# EAGLE board datalogger_small (EAGLE 9.6.2)
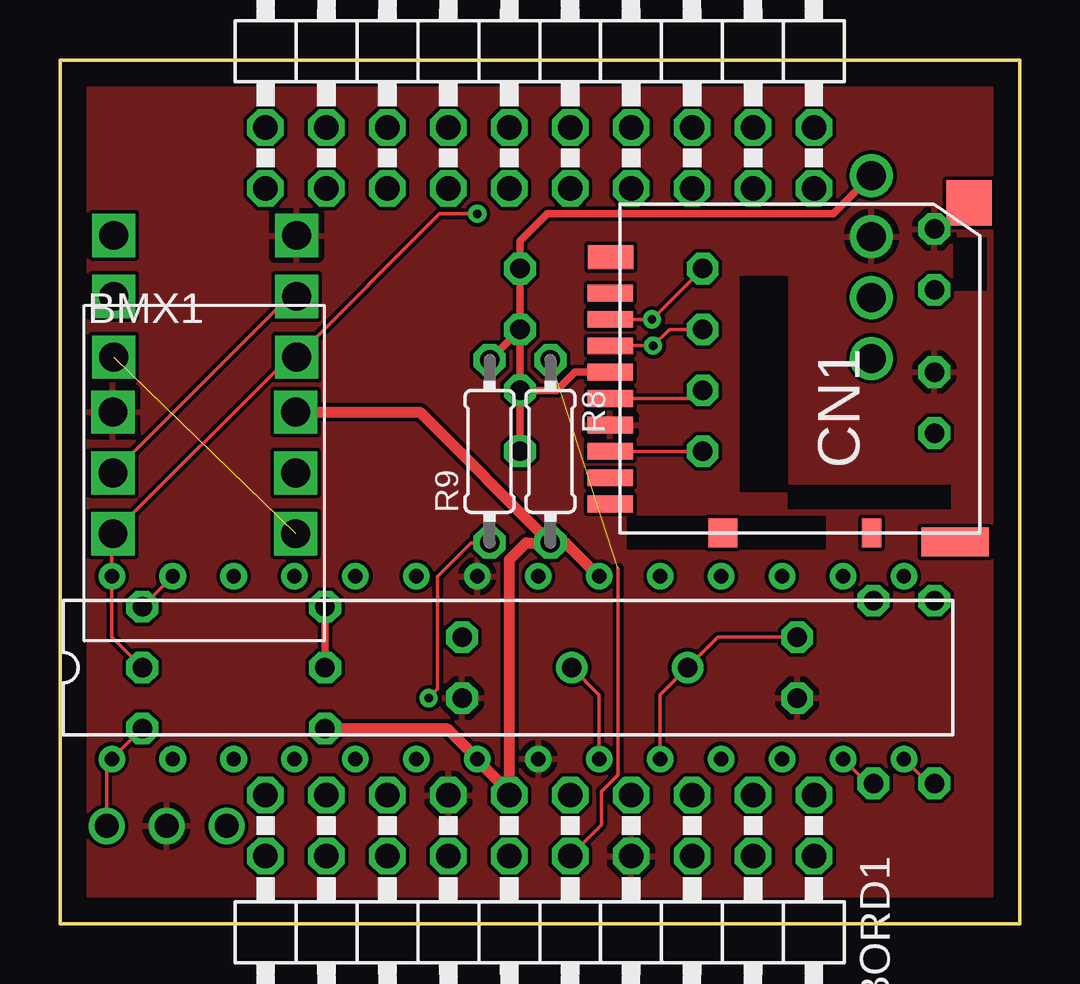
[diagram p0: board, top side]
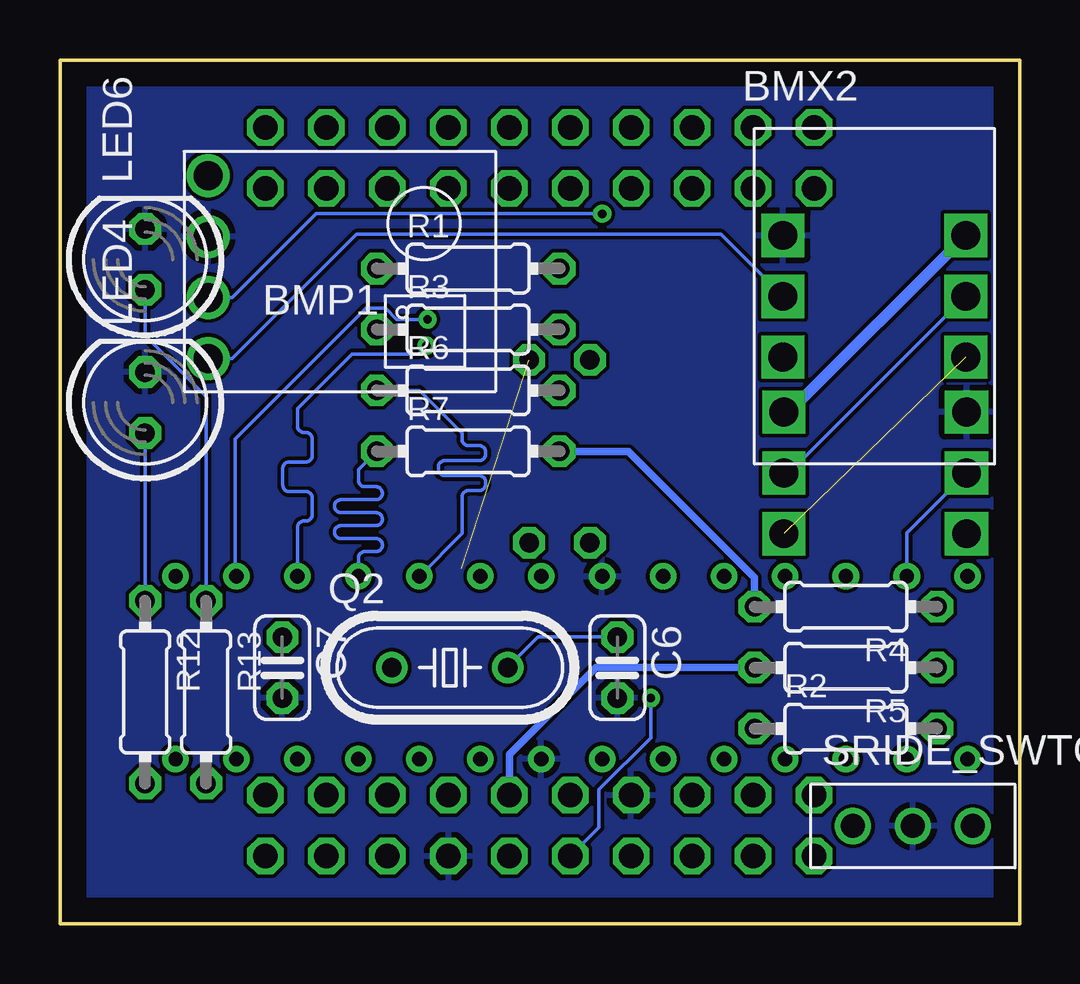
[diagram p1: board, bottom side, seen from below]

Size 40 x 36 mm. Coordinates in mm from the lower left corner, seen from the top.
Outline: 0,0 0,36 40,36 40,0 0,0
Copper layers (1*16): Top 0.035mm / dielectric 1.5mm / Bottom 0.035mm
Design rules "default": minimum track width 6mil, minimum drill 0.35mm, track to track 6mil, track to pad 6mil, pad to pad 6mil, via to via 6mil, smd to smd 6mil, copper to edge 40mil, drill to drill 6mil, minimum pad ring 10mil, minimum via ring 8mil, stop-mask expansion 4mil, vias tented up to drill 0mil, thermal gap 10mil
Net classes: 1 SIGNAL: width 0.152 mm, drill 0.152 mm, clearance 0.152 mm; 2 POWER_H: width 0.457 mm, drill 0.152 mm, clearance 0.152 mm; 3 POWER_L: width 0.305 mm, drill 0.152 mm, clearance 0.152 mm; 4 GND: width 0.305 mm, drill 0.152 mm, clearance 0.152 mm

## Footprints (pad centres in the part's own frame; a part is rotated, then mirrored left to right if it is on the bottom)
GY-68 = drill 1.2: P1 -5,4; P2 -5,1.46; P3 -5,-1.08; P4 -5,-3.62
BMX055 = drill 1.2 pad 1.5 square: 3V3 8.81,-9.53; GND 1.19,-4.46; SCL 1.19,-9.53; SDA 1.19,-7; VCC 8.81,-4.46; VCCIO 8.81,-7
2X10/90 = drill 1.016 octagon: 1 -11.43,-6.35; 2 -11.43,-3.81; 3 -8.89,-6.35; 4 -8.89,-3.81; 5 -6.35,-6.35; 6 -6.35,-3.81; 7 -3.81,-6.35; 8 -3.81,-3.81; 9 -1.27,-6.35; 10 -1.27,-3.81; 11 1.27,-6.35; 12 1.27,-3.81; 13 3.81,-6.35; 14 3.81,-3.81; 15 6.35,-6.35; 16 6.35,-3.81; 17 8.89,-6.35; 18 8.89,-3.81; 19 11.43,-6.35; 20 11.43,-3.81
C025-024X044 = drill 0.813 octagon: 1 -1.27,0; 2 1.27,0
DM3AT = smd 0.7 x 1.9: CD/DAT3 2.2,6.4; CLK -1.1,6.4; CMD 1.1,6.4; DAT0 -3.3,6.4; DAT1 -4.4,6.4; DAT2 3.3,6.4; DET_B -5.5,6.4; VDD 0,6.4; VSS -2.2,6.4 | smd 1.2 x 0.8: DET_A -6.7,-4.5 | smd 1 x 1.9: P$9 4.8,6.381 | smd 1.2 x 1.2: P$11 -6.7,1.7 | smd 1.2 x 2.8: P$13 -7.081,-7.973 | smd 1.9 x 1.9: P$14 7.054,-8.562
LED5MM = drill 0.813 octagon: A -1.27,0; K 1.27,0
HC49/S = drill 0.813: 1 -2.413,0; 2 2.413,0
0204/7 = drill 0.813 octagon: 1 -3.81,0; 2 3.81,0
SRIDE_SWITCH = drill 1: L -2.5,0; LR 0,0; R 2.5,0
ATMEGA328P = drill 0.6: AREF 17.78,7.62; AVCC 20.32,7.62; D1TX 5.08,0; D2 7.62,0; D3 10.16,0; D4 12.7,0; D5 25.4,0; D6 27.94,0; D7 30.48,0; D8 33.02,0; D9 33.02,7.62; D14 12.7,7.62; D15 10.16,7.62; D16 7.62,7.62; D17 5.08,7.62; GND1 17.78,0; GND2 15.24,7.62; MISOD12 25.4,7.62; MOSID11 27.94,7.62; PB6 20.32,0; PB7 22.86,0; RESET 0,0; RXD0 2.54,0; SCKD13 22.86,7.62; SCLD19 0,7.62; SDAD18 2.54,7.62; SSD10 30.48,7.62; VCC 15.24,0

## Placement (x,y rotation side)
BMP1  BMP180  [GY-68]  28.83,27.18 0 bottom
BMX1  BMX055  [BMX055]  1.02,25.78 0 top
BMX2  BMX055  [BMX055]  11.05,33.15 0 bottom
BORD1  [2X10/90]  20,-1 180 top
BORD4  [2X10/90]  20,37 0 top
C6  22p  [C025-024X044]  16.76,10.67 270 bottom
C7  22p  [C025-024X044]  30.73,10.67 270 bottom
CN1  DM3AT  [DM3AT]  29.34,22.99 90 top
LED4  [LED5MM]  36.45,21.72 90 bottom
LED6  [LED5MM]  36.45,27.69 90 bottom
Q2  16mhz  [HC49/S]  23.75,10.67 0 bottom
R1  10k  [0204/7]  22.99,27.3 0 bottom
R2  [0204/7]  7.24,8.13 0 bottom
R3  10k  [0204/7]  22.99,24.77 0 bottom
R4  10k  [0204/7]  7.24,13.21 180 bottom
R5  10k  [0204/7]  7.24,10.67 180 bottom
R6  10k  [0204/7]  22.99,22.23 0 bottom
R7  10k  [0204/7]  22.99,19.68 0 bottom
R8  0  [0204/7]  20.45,19.68 270 top
R9  0  [0204/7]  17.91,19.68 90 top
R12  100  [0204/7]  36.45,9.65 270 bottom
R13  100  [0204/7]  33.91,9.65 270 bottom
SRIDE_SWTCH2  SRIDE_SWITCH  [SRIDE_SWITCH]  4.45,4.06 0 bottom
U$6  ATMEGA238P  [ATMEGA328P]  2.16,6.86 0 top

## Library data of the parts
BMP1 = BMP180
BMX1 BMX2 = BMX055
BORD1 BORD4 = pinhead
C6 C7 = rcl; SPICEPREFIX: C
CN1 = microSD
LED4 LED6 = led
Q2 = crystal; OC_FARNELL: 1667008; OC_NEWARK: unknown
R1-R9 R12 R13 = rcl; SPICEPREFIX: R
SRIDE_SWTCH2 = Sride Switch
U$6 = atmega328p

## Nets
3V3 [POWER_L]: BMX1.3V3 BMX2.3V3
+3V3 [POWER_L]: BMP1.P1 BORD1.9 CN1.VDD R1.2 R3.2 R4.2 R5.2 R6.2 R7.2 R9.2
+5V [POWER_H]: BMX1.VCC BMX2.VCC BORD1.11 R2.1 R8.2 U$6.AVCC U$6.VCC
CLK [SIGNAL]: CN1.CLK R6.1 U$6.SCKD13
GND [GND]: BMP1.P2 BMX1.GND BMX2.GND BORD1.8 BORD1.13 C6.2 C7.2 CN1.VSS LED4.K LED6.K SRIDE_SWTCH2.LR U$6.GND1 U$6.GND2
LED1.0 [SIGNAL]: R13.2 U$6.D7
LED1.1 [SIGNAL]: R12.2 U$6.D8
N$1 [SIGNAL]: LED6.A R13.1
N$2 [SIGNAL]: C6.1 Q2.2 U$6.PB6
N$4 [SIGNAL]: C7.1 Q2.1 U$6.PB7
N$6 [SIGNAL]: BORD1.10 R8.1
N$7 [SIGNAL]: LED4.A R12.1
N$8 [SIGNAL]: R2.2 SRIDE_SWTCH2.R U$6.RESET
N$9 [SIGNAL]: BORD1.12 R9.1
SCL [SIGNAL]: BMP1.P3 BMX1.SCL BMX2.SCL R5.1 U$6.SCLD19
SD-MISO [SIGNAL]: CN1.DAT0 R7.1 U$6.MISOD12
SD-MOSI [SIGNAL]: CN1.CMD R3.1 U$6.MOSID11
SD-SS [SIGNAL]: CN1.CD/DAT3 R1.1 U$6.SSD10
SDA [SIGNAL]: BMP1.P4 BMX1.SDA BMX2.SDA R4.1 U$6.SDAD18
VCCIO [SIGNAL]: BMX1.VCCIO BMX2.VCCIO

## Tracks (layer width: path | path; a pad name or v marks a point on that pad's centre or on a via)
3V3  (1 unrouted)
+3V3
  Top 0.305: R5.2 R4.2 | R7.2 R6.2 | R6.2 R3.2 | R3.2 R1.2 19.18,28.45 20.33,29.6 20.33,29.58 32.23,29.58 BMP1.P1 | R6.2 20.7,22.23 21.46,22.99 CN1.VDD | R9.2 R3.2
  Bottom 0.305: R5.2 17.65,10.67 21.27,7.05 BORD1.9 | R7.2 16.31,19.68 11.65,15.02 11.21,14.58 11.05,14.42 R4.2
+5V
  Top 0.457: R2.1 16.13,8.13 U$6.VCC 17.4,6.81 18.73,5.48 BORD1.11 18.73,15.17 19.43,15.88 R8.2 | R8.2 21.08,15.88 U$6.AVCC | BMX1.VCC 15,21.32 R8.2
  Bottom 0.457: BMX2.VCC 9.61,21.32 BMX1.VCC
CLK
  Top 0.152: CN1.CLK 26.46,21.89 R6.1
  Bottom 0.152: R6.1 25.02,22.23 23.24,20.45 23.24,20.19 arc-90 22.97,19.92 22.52,19.92 arc90 22.25,19.66 22.25,19.56 arc90 22.52,19.3 23.96,19.3 arc-90 24.23,19.03 24.23,18.94 arc-90 23.96,18.67 22.52,18.67 arc90 22.25,18.41 22.25,18.31 arc90 22.52,18.05 22.97,18.05 arc-90 23.24,17.78 23.24,16.26 U$6.SCKD13
GND
  pour Top: -6.35,-10.16 -6.35,41.91 3.81,52.07 39.37,52.07 48.26,52.07 58.42,41.91 58.42,-5.08 50.8,-12.7 45.72,-17.78 0,-17.78 -6.35,-11.43
  pour Bottom: -7.62,41.91 2.54,52.07 46.99,52.07 57.15,41.91 57.15,-5.08 46.99,-15.24 3.81,-15.24 -7.62,-3.81
LED1.0
  Top 0.152: U$6.D7 33.66,5.84 R13.2
LED1.1
  Top 0.152: U$6.D8 36.2,5.84 R12.2
N$1
  Bottom 0.152: R13.1 33.91,21.97 36.45,24.51 LED6.A
N$2
  Top 0.152: U$6.PB6 22.48,9.53 Q2.2
  Bottom 0.152: Q2.2 20.07,11.94 C6.1
N$4
  Top 0.152: C7.1 27.43,11.94 Q2.1 25.02,9.53 U$6.PB7
N$6  (1 unrouted)
  Top 0.152: BORD1.10 22.57,4.11 22.57,5.51 23.26,6.2 23.26,14.8
N$7
  Bottom 0.152: LED4.A R12.1
N$8
  Top 0.152: R2.2 U$6.RESET 1.95,6.64 SRIDE_SWTCH2.R
N$9  (via drill 0.35)
  Top 0.152: v15.37,9.4 15.75,9.78 15.75,14.48 17.14,15.88 R9.1
  Bottom 0.152: v15.37,9.4 15.37,7.75 17.53,5.59 17.53,4.01 BORD1.12
SCL  (via drill 0.35)
  Top 0.152: R5.1 2.16,11.94 U$6.SCLD19 2.16,16.2 BMX1.SCL 9.57,23.62 BMX2.SCL 15.83,29.59 v17.4,29.59
  Bottom 0.152: BMP1.P3 32.82,26.1 29.33,29.59 v17.4,29.59
SD-MISO
  Top 0.152: CN1.DAT0 R7.1
  Bottom 0.152: R7.1 27.56,18.92 27.56,18.48 arc-90 27.29,18.21 26.83,18.21 arc90 26.56,17.94 26.56,17.94 arc90 26.83,17.67 28.29,17.67 arc-90 28.56,17.4 28.56,17.39 arc-90 28.29,17.13 26.83,17.13 arc90 26.56,16.86 26.56,16.86 arc90 26.83,16.59 28.29,16.59 arc-90 28.56,16.32 28.56,16.31 arc-90 28.29,16.05 26.83,16.05 arc90 26.56,15.78 26.56,15.77 arc90 26.83,15.51 27.29,15.51 arc-90 27.56,15.24 U$6.MISOD12
SD-MOSI  (via drill 0.35)
  Top 0.152: CN1.CMD v24.72,24.09 25.4,24.77 R3.1
  Bottom 0.152: U$6.MOSID11 30.1,16.51 arc90 29.83,16.78 29.75,16.78 arc-90 29.48,17.04 29.48,17.74 arc-90 29.75,18.01 30.45,18.01 arc90 30.71,18.27 30.71,18.97 arc90 30.45,19.24 29.75,19.24 arc-90 29.48,19.51 29.48,20.21 arc-90 29.75,20.47 29.83,20.47 arc90 30.1,20.74 30.1,21.46 27.81,23.75 25.06,23.75 v24.72,24.09
SD-SS  (via drill 0.35)
  Top 0.152: CN1.CD/DAT3 v24.68,25.19 R1.1
  Bottom 0.152: U$6.SSD10 32.7,14.54 32.7,20.19 27.24,25.65 26.43,25.65 25.96,25.19 v24.68,25.19
SDA
  Top 0.152: U$6.SDAD18 R4.1 | BMX1.SDA 9.57,26.15 BMX2.SDA
  Bottom 0.152: BMP1.P4 32.82,23.56 27.64,28.73 27.64,28.74 12.45,28.74 BMX2.SDA | BMX1.SDA 4.7,16.29 U$6.SDAD18
VCCIO
  Bottom 0.152: BMX2.VCCIO 9.61,18.78 BMX1.VCCIO